# Altium PCB batt_swap.PcbDoc
Units mm, origin at the board's own origin, x right, y up, seen from the top; angles counter-clockwise.
Board outline 44 x 22 mm, 2 copper layers (Top Layer, Bottom Layer); 13 components, 8 nets, 49 pads, 5 vias.
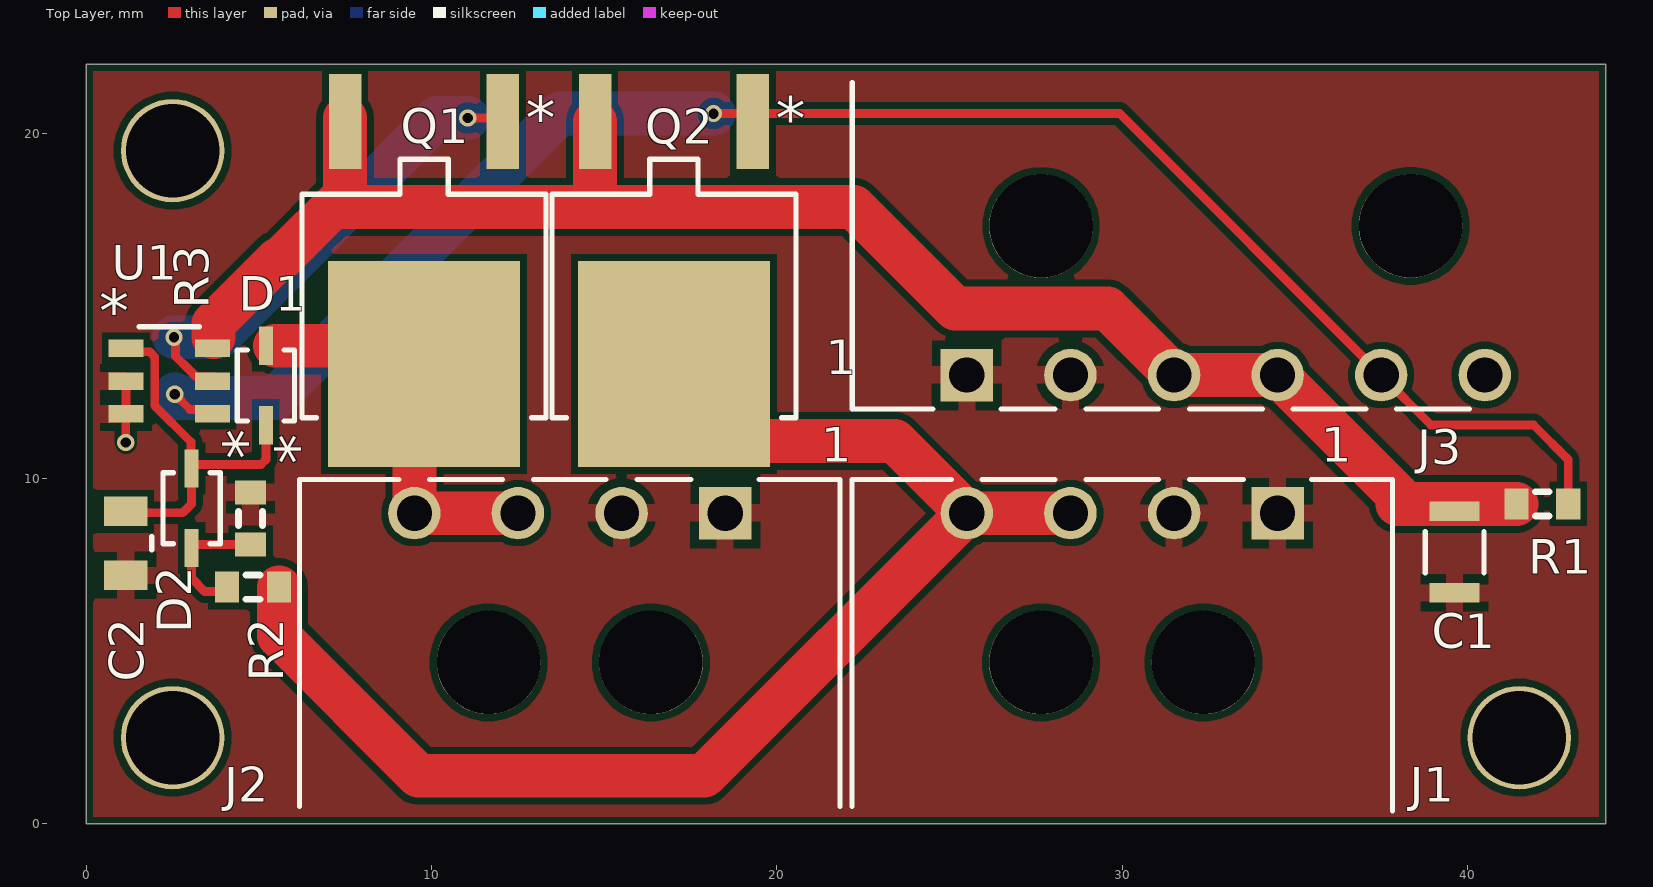
[diagram p0: Top Layer view]
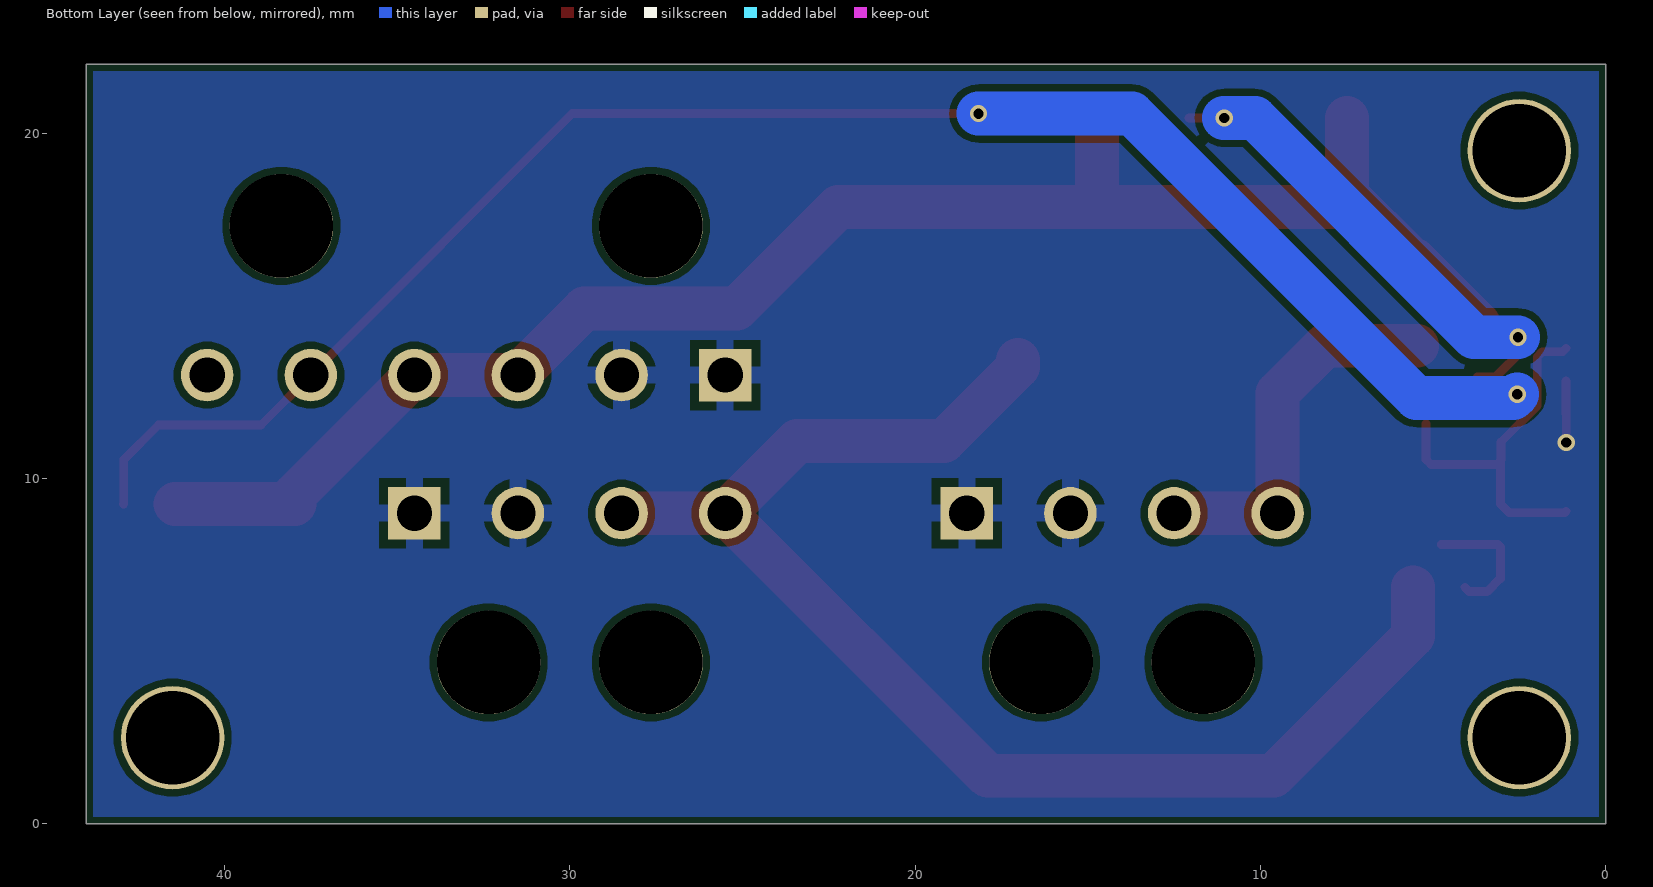
[diagram p1: Bottom Layer view, seen from below]
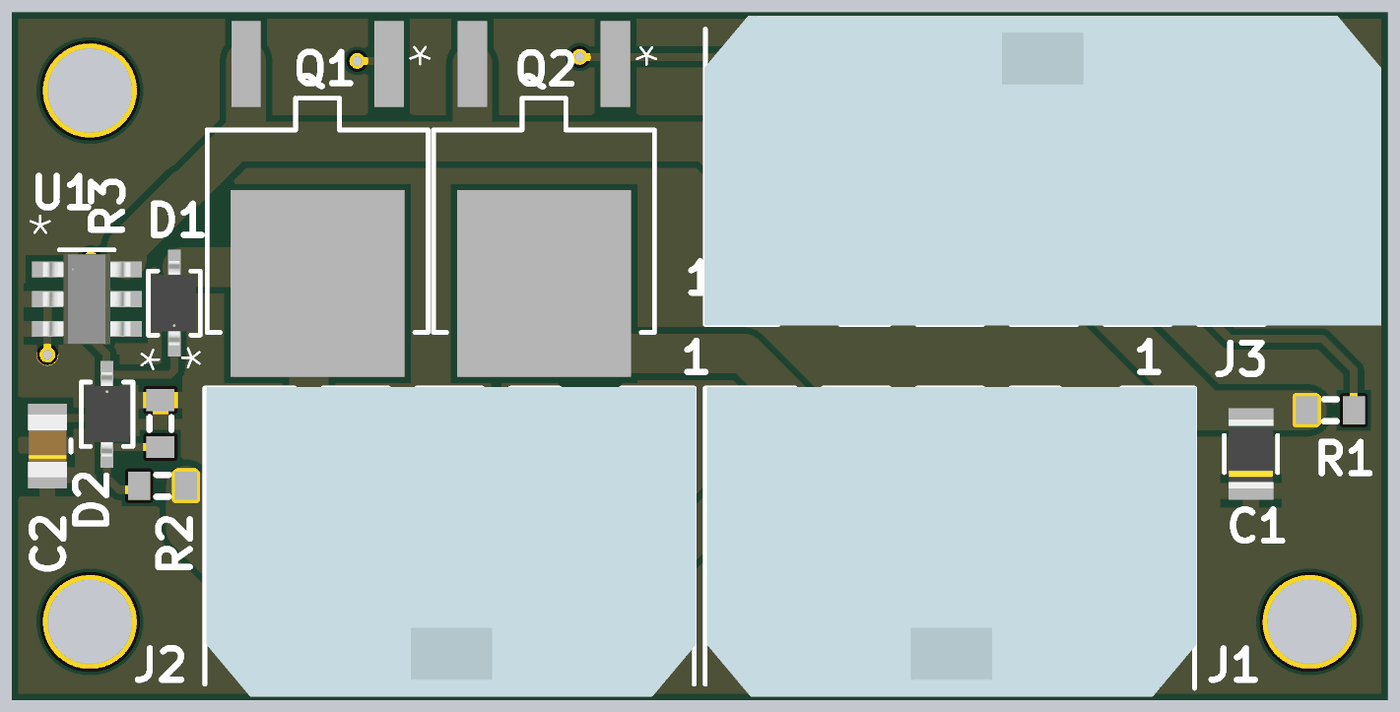
[diagram p2: 3D render of the assembled board from above, using the file's embedded part models]

## Layer stack, top to bottom
Top Solder: solder mask 0.0102, Solder Resist, Dk 3.5
Top Layer: signal copper 0.0356
Dielectric 1: dielectric 0.32, FR-4, Dk 4.8
Bottom Layer: signal copper 0.0356
Bottom Solder: solder mask 0.0102, Solder Resist, Dk 3.5

## Board outline
0,0 0,22 44,22 44,0

## Design rules (kind name [scope] priority, off if disabled: settings)
BoardOutlineClearance [All] p1: gap=0.2 ignorepadtopadclearanceinfootprint=FALSE except(0.4: Arc-SplitBarrior Arc-SplitContinuation Track-SplitBarrior Track-SplitContinuation SMDPad-SplitBarrior SMDPad-SplitContinuation THPad-SplitBarrior THPad-SplitContinuation Via-SplitBarrior Via-SplitContinuation Fill-SplitBarrior Fill-SplitContinuation Poly-SplitBarrior Poly-SplitContinuation Region-SplitBarrior Region-SplitContinuation Text-SplitBarrior Text-SplitContinuation)
Clearance "Clearance Bottom Layer" [OnLayer('Bottom Layer')] p1: gap=0.203 ignorepadtopadclearanceinfootprint=TRUE except(0.254: Arc-Text Track-Text SMDPad-Text THPad-Text Via-Text Fill-Text Poly-Text Region-Text Text-Text)
Clearance "Clearance Top Layer" [OnLayer('Top Layer')] p2: gap=0.203 ignorepadtopadclearanceinfootprint=TRUE except(0.254: Arc-Text Track-Text SMDPad-Text THPad-Text Via-Text Fill-Text Poly-Text Region-Text Text-Text)
Clearance [All] p3: gap=0.2 ignorepadtopadclearanceinfootprint=FALSE except(0.089: Arc-Arc Arc-Track Arc-SMDPad Track-Track Track-SMDPad SMDPad-SMDPad; 0.127: Arc-Via Track-Via SMDPad-Via THPad-Via Via-Via; 0.254: Arc-Text Track-Text SMDPad-Text THPad-Text Via-Text Fill-Text Poly-Text Region-Text Text-Text)
HoleSize [All] p1: absolutevalues=TRUE maxlimit=6.3 minlimit=0.2 maxpercent=80.000 minpercent=20.000
MinimumAnnularRing [All] p1: minimumring=0.076
MinimumSolderMaskSliver [All] p1: minsoldermaskwidth=0.1
PolygonConnect PolygonConnect_1 [All] p1: thpad.connectstyle=Relief thpad.reliefconductorwidth=0.508 thpad.reliefentries=4 thpad.polygonreliefangle="90 Angle" thpad.airgapwidth=0.254 smdpad.connectstyle=Relief smdpad.reliefconductorwidth=0.508 smdpad.reliefentries=4 smdpad.polygonreliefangle="90 Angle" smdpad.airgapwidth=0.254 via.connectstyle=Direct via.reliefconductorwidth=0.508 via.reliefentries=4 via.polygonreliefangle="90 Angle" via.airgapwidth=0.254
RoutingCorners [All] p1: cornerstyle=Round minsetback=2.54 maxsetback=2.54
RoutingVias [All] p1: holewidth=0.5 width=1 viastyle="Through Hole" minholewidth=0.2 minwidth=0.45 maxholewidth=1 maxwidth=2
SilkToSilkClearance [All] p1: silktosilkclearance=0.1
SilkToSolderMaskClearance [IsPad] p1: minsilkscreentomaskgap=0.1 clearancetoexposedcopper=TRUE
SolderMaskExpansion [All] p1: expansion=0.102 istentingtop=FALSE
Width [All] p1: maxlimit=2.54 minlimit=0.089 preferedwidth=0.381
25 further rules are at their usual default settings.

## Components (designator, comment, footprint, x,y, rotation, side; value= is the part's Value field where it differs from the comment)
C1 "C2012JB1V226M125AC" CAP_2012_TDK 39.624,7.874 r90 top
C2 "CL21B105KBFNNNE" CAP_CL21_SAM 1.143,8.128 r90 top
D1 "SD103AWS-7-F" SOD323_DIO 5.2,12.7 r90 top
D2 "SD103AWS-7-F" SOD323_DIO 3.048,9.144 r270 top
J1 "436500400" CON_436500400_MOL 34.5,9 r0 top
J2 "436500400" CON_436500400_MOL 18.5,9 r0 top
J3 "436500600" CON_436500600_MOL 25.5,13 r180 top
Q1 "AOD407" TO252_AOS 9.779,15 r180 top
Q2 "AOD407" TO252_AOS 17.018,15 r180 top
R1 "Res3" J1-0603 42.164,9.271 r180 top value=470k
R2 "Res3" J1-0603 4.826,6.858 r0 top value=0603
R3 "Res3" J1-0603 4.757,8.847 r270 top value=0603
U1 "LTC4412ES6#TRPBF" LTC4412ES6#TRPBF_ADI 2.4,12.827 r0 top

## Footprints (in the part's own frame and the unit in brackets; to place one, negate y for a bottom-side part, rotate by r counter-clockwise, add the part's x,y. Pads: shape width x height; smd on the part's side, far side on the other; paste and mask are expansions set on the pad)
CAP_2012_TDK [mil]
  rect 22x57 smd paste+0 mask+0: 1(-46.5,0) 2(46.5,0)
  silkscreen extent -23,-34 23,34, body extent -44,-29 44,29, height 49
CAP_CL21_SAM [mm]
  rect 0.856x1.25 smd paste+0 mask+0: 1(-0.928,0) 2(0.928,0)
  silkscreen extent -0.19,-0.75 0.19,-0.75, body extent -1,-0.63 1,0.63, height 1.35
CON_436500400_MOL [mm]
  rect 1.52x1.52 hole 1.02 mask+0.076: 1(0,0)
  round 1.52 hole 1.02 mask+0.076: 2(-3,0) 3(-6,0) 4(-9,0)
  round 3 hole 3 unplated mask+0.076: M1(-2.15,-4.32) M2(-6.85,-4.32)
  silkscreen extent -12.32,-8.62 3.32,0.98, body extent -12.27,-8.89 3.38,1.01, height 5.58
CON_436500600_MOL [mm]
  rect 1.52x1.52 hole 1.02 mask+0.076: 1(0,0)
  round 1.52 hole 1.02 mask+0.076: 2(-3,0) 3(-6,0) 4(-9,0) 5(-12,0) 6(-15,0)
  round 3 hole 3 unplated mask+0.076: M1(-2.15,-4.32) M2(-12.85,-4.32)
  silkscreen extent -14.55,-8.46 3.32,0.98, body extent -18.29,-8.89 3.35,1.01, height 5.06
J1-0603 [mm] "Chip Resistor, Body 1.6x0.8mm, IPC High Density"
  rect 0.7x0.9 smd: 1(-0.75,0) 2(0.75,0)
  silkscreen extent -0.2,-0.35 0.2,0.35, body extent -0.85,-0.48 0.85,0.48, height 0.9
LTC4412ES6#TRPBF_ADI [mil]
  rect 39.62x20 smd paste+0 mask+0: 1(-49.31,37.4) 2(-49.31,0) 3(-49.31,-37.4) 4(49.31,-37.4) 5(49.31,0) 6(49.31,37.4)
  silkscreen extent -35,62 34,62, body extent -55,-57 55,57, height 39
SOD323_DIO [mm]
  rect 1.111x0.401 smd paste+0 mask+0: 1(-1.15,0) 2(1.15,0)
  silkscreen extent -1.03,-0.83 1.03,0.83, body extent -1.35,-0.7 1.35,0.7, height 0.81
TO252_AOS [mil]
  rect 37x108 smd paste+0 mask+0: 1(-90,-210.5) 2(90,-210.5)
  rect 219x235 smd paste+0 mask+0: 3(0,66)
  silkscreen extent -139,-168 139,128, body extent 0,0 10,10, height 10

## Part data
C1: "No Description Available", Mfr_Name=TDK
C2: "No Description Available", Mfr_Name=Samsung
D1 D2: "No Description Available", Mfr_Name="Diodes Inc"
J1 J2 J3: "No Description Available", Mfr_Name="Molex Connector Corporation", Copyright="Copyright (C) 2023 Ultra Librarian. All rights reserved.", RefDes=RefDes, Type=DEV
  J1 J2: Manufacturer_Part_Number=436500400
  J3: Manufacturer_Part_Number=436500600
Q1 Q2: "No Description Available", Manufacturer_Part_Number=AOD256, Mfr_Name="Alpha and Omega Semiconductor", Copyright="Copyright (C) 2023 Ultra Librarian. All rights reserved.", RefDes=RefDes, Type=DEV
R1 R2 R3: "Resistor", LatestRevisionDate=29-May-2009, LatestRevisionNote="IPC-7351 Footprint Added.", PackageDescription="Chip Resistor", PackageReference=J1-0603, Published=8-Jun-2000, Publisher="Altium Limited"
U1: "No Description Available", Mfr_Name="Analog Devices Inc", RefDes=RefDes, Type=Type

## Free pads (board coordinates)
  round 3 hole 2.7: 2(2.5,2.5) 2(2.5,19.5) 2(41.5,2.5)

## Via types
v1: diameter 0.5, hole 0.3, Top Layer to Bottom Layer, 5 vias

## Nets (pads, with @x,y where several pads share a name; then routed paths per layer and width w, separated by ;. In a path a pad name is that pad's centre, name@x,y a point inside that pad or via, vN(x,y) a via of type N, cw(c..) or ccw(c..) an arc to the next point about the centre after c; other vN are vias at no path point)
batt: D1.2 J2.3 J2.4 Q1.3 | length 11.1
  Top Layer w1.27: 5.461,13.85 8.128,13.85 9.5,12.478 J2.4 J2.3
GND: C1.1 C2.1 J1.1 J1.2 J2.1 J2.2 J3.1 J3.2 R3.1 U1.2 U1.3 | length 1.8
  Top Layer w0.254: v1(1.143,11.049) 1.143,11.872 U1.3 U1.2
hub: J1.3 J1.4 Q2.3 R2.2 | length 39.6
  Top Layer w1.27: R2.2 5.576,5.443 9.622,1.397 17.897,1.397 J1.4 ; Q2.3@17.018,13.437 17.018,13.233 19.164,11.087 23.413,11.087 J1.4 ; J1.3 J1.4
NetC2_2: C2.2 D1.1 D2.1 U1.1 | length 10.9
  Top Layer w0.254: C2.2 1.182,9.017 2.794,9.017 3.048,9.271 D2.1 D2.1@3.048,10.41 ; U1.1 1.251,13.674 1.832,13.674 1.981,13.525 1.981,12.116 3.032,11.065 3.032,10.541 3.038,10.541 3.048,10.531 D2.1@3.048,10.41 ; D1.1@5.207,11.592 5.207,10.559 5.058,10.41 D2.1@3.048,10.41
NetD2_2: D2.2 R2.1 R3.2 | length 3.9
  Top Layer w0.254: R2.1 3.949,6.731 3.429,6.731 3.048,7.112 D2.2 3.048,8.024 3.121,8.097 R3.2
NetQ1_1: Q1.1 U1.5 | length 14.1
  Top Layer w0.254: v1(2.537,14.097) 2.584,14.05 2.584,13.549 2.991,13.142 3.179,12.954 U1.5@3.72,12.954 ; v1(11.049,20.447) Q1.1@12.065,20.447
  Bottom Layer w1.27: v1(2.537,14.097) 3.81,14.097 10.16,20.447 v1(11.049,20.447)
stat: J3.5 Q2.1 R1.1 U1.4 | length 50.8
  Top Layer w0.254: v1@2.561,12.443 3,12.004 3.757,12.004 U1.4@3.844,11.917 ; v1(18.161,20.574) 29.926,20.574 J3.5 38.943,11.557 41.91,11.557 42.914,10.553 R1.1 R1.1@42.92,9.265
  Bottom Layer w1.27: v1(2.561,12.446) 2.675,12.332 5.474,12.332 13.716,20.574 v1(18.161,20.574)
vout: C1.2 J3.3 J3.4 Q1.2 Q2.2 R1.2 U1.6 | length 48.1
  Top Layer w1.27: 3.683,14.097 3.683,14.488 5.549,16.354 5.627,16.354 7.493,18.221 ; 7.321,17.869 14.732,17.869 ; 7.493,18.348 Q1.2@7.493,20.447 ; Q2.2 14.732,17.869 ; R1.2 37.973,9.271 37.973,9.527 J3.4 J3.3 29.569,14.931 25.163,14.931 22.225,17.869 14.732,17.869
pads on no net: J1.M1 J1.M2 J2.M1 J2.M2 J3.6 J3.M1 J3.M2

## Polygon pours and split planes (outlines as drawn)
GND on Bottom Layer "GND_L02_P000" (solid, pour order 0): 0,0 0,21.976 44,21.976 44,0
GND on Top Layer "GND_L01_P001" (solid, pour order 1): 0,0 0,21.976 44,21.976 44,0

## Silkscreen, mask and mechanical layers (free items; w line width, h text height)
Top Overlay:
  text "1" at 21.409,13.027 h1
  text "1" at 21.282,10.487 h1
  text "1" at 35.76,10.487 h1
Mechanical 1:
  the board outline again, w0.254

## Text inside footprints (layer, text, board x,y; h text height)
D1: Top Overlay "*" at 6.731,10.414 h1.27 r90; Mechanical 13 "*" at 5.835,11.736 h1.27 r90
D2: Top Overlay "*" at 3.429,11.43 h1.27 r270; Mechanical 13 "*" at 2.413,10.108 h1.27 r270
J1: Bottom Assembly "PTH_DRILL_SIZE:_1.02_MM,_TOL:_+0.05/-0.05" at 16.983,-5.13 h1.27; Bottom Assembly "NPTH_DRILL_SIZE:_3.0_MM,_TOL:_+0.05/-0.05" at 16.983,-7.67 h1.27; Mechanical 10 "PTH_DRILL_SIZE:_1.02_MM,_TOL:_+0.05/-0.05" at 16.983,-5.13 h1.27; Mechanical 10 "NPTH_DRILL_SIZE:_3.0_MM,_TOL:_+0.05/-0.05" at 16.983,-7.67 h1.27
J2: Bottom Assembly "PTH_DRILL_SIZE:_1.02_MM,_TOL:_+0.05/-0.05" at 0.983,-5.13 h1.27; Bottom Assembly "NPTH_DRILL_SIZE:_3.0_MM,_TOL:_+0.05/-0.05" at 0.983,-7.67 h1.27; Mechanical 10 "PTH_DRILL_SIZE:_1.02_MM,_TOL:_+0.05/-0.05" at 0.983,-5.13 h1.27; Mechanical 10 "NPTH_DRILL_SIZE:_3.0_MM,_TOL:_+0.05/-0.05" at 0.983,-7.67 h1.27
J3: Bottom Assembly "NPTH_DRILL_SIZE:_3.0_MM,_TOL:_+0.05/-0.05" at 46.017,29.67 h1.27 r180; Bottom Assembly "PTH_DRILL_SIZE:_1.02_MM,_TOL:_+0.05/-0.05" at 46.017,27.13 h1.27 r180; Mechanical 10 "NPTH_DRILL_SIZE:_3.0_MM,_TOL:_+0.05/-0.05" at 46.017,29.67 h1.27 r180; Mechanical 10 "PTH_DRILL_SIZE:_1.02_MM,_TOL:_+0.05/-0.05" at 46.455,27.224 h1.27 r180
Q1: Top Overlay "*" at 13.589,21.617 h1.27 r180; Mechanical 13 "*" at 12.383,18.493 h1.27 r180
Q2: Top Overlay "*" at 20.828,21.604 h1.27 r180; Mechanical 13 "*" at 19.621,18.493 h1.27 r180
U1: Top Overlay "*" at 0.381,14.224 h1.27; Mechanical 13 "*" at 1.714,12.929 h1.27